# Altium PCB PCB1_HTTNTD.PcbDoc
Units mm, origin at the board's own origin, x right, y up, seen from the top; angles counter-clockwise.
Board outline 150.62 x 105.41 mm, 2 copper layers (Top Layer, Bottom Layer); 40 components, 33 nets, 167 pads, 5 vias.
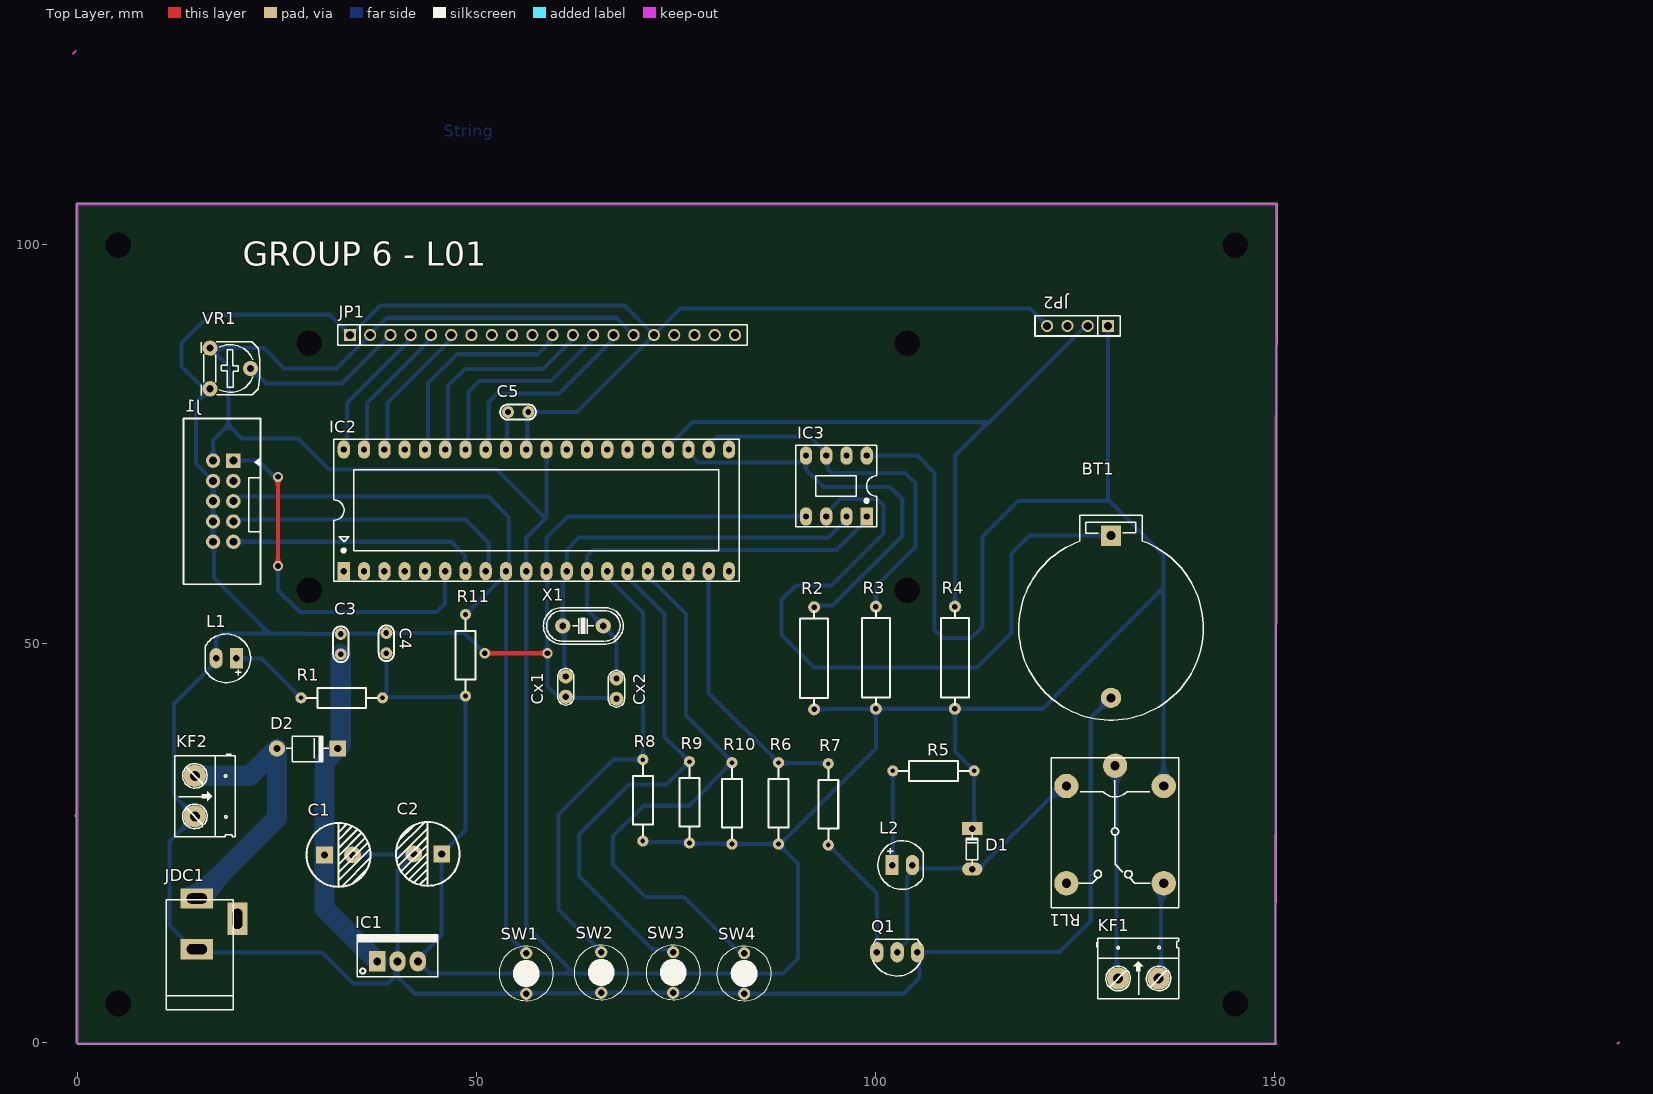
[diagram p0: Top Layer view]
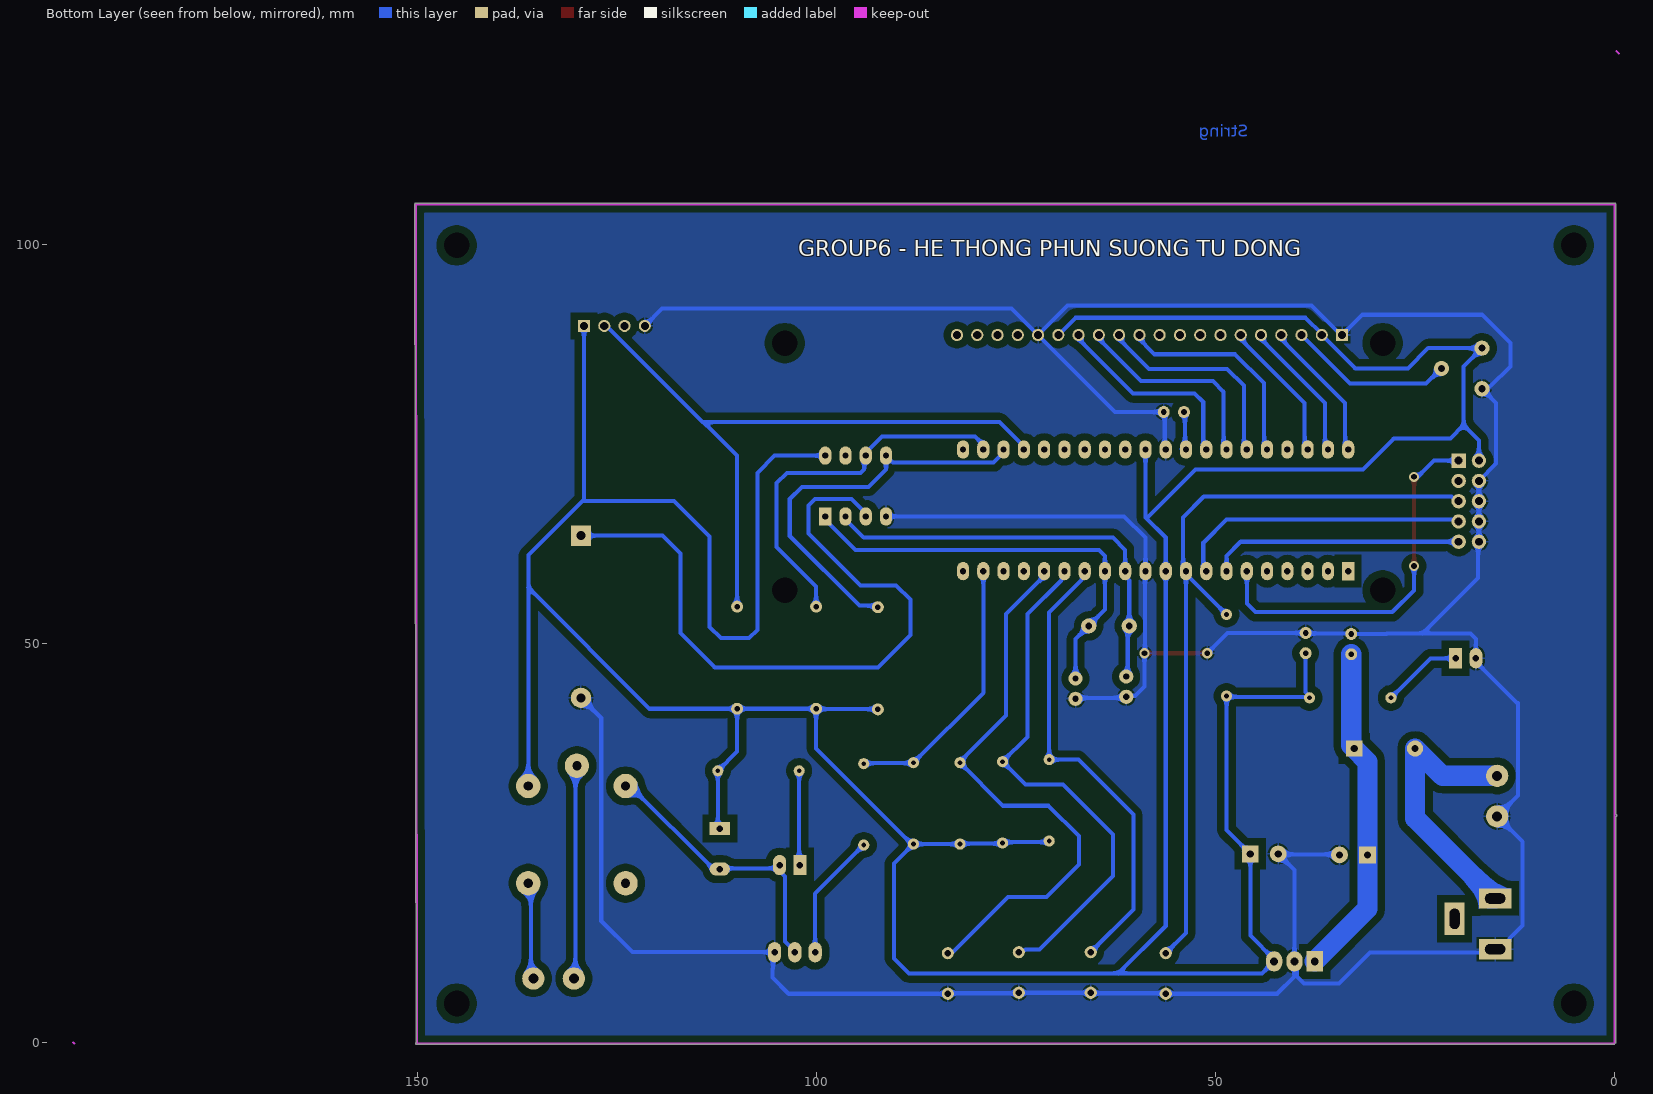
[diagram p1: Bottom Layer view, seen from below]
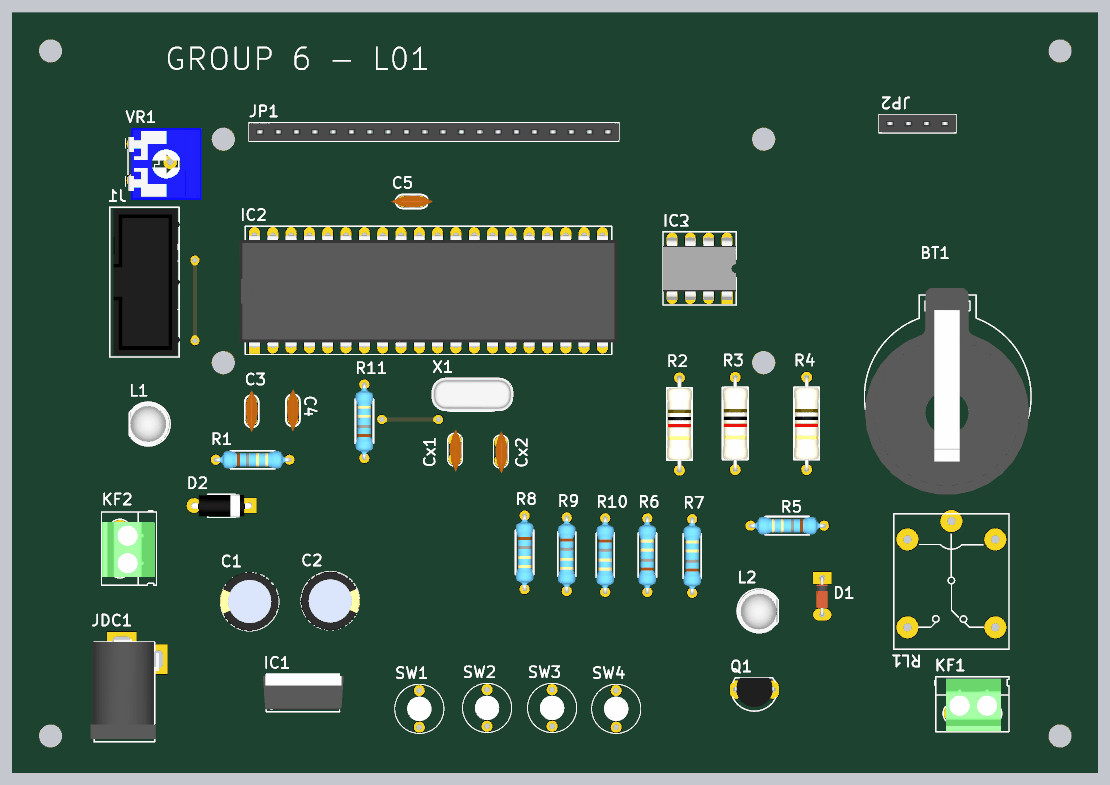
[diagram p2: 3D render of the assembled board from above, using the file's embedded part models]

## Layer stack, top to bottom
Top Solder: solder mask 0.0102, Solder Resist, Dk 3.5
Top Layer: signal copper 0.0356
Dielectric 1: dielectric 0.32, FR-4, Dk 4.8
Bottom Layer: signal copper 0.0356
Bottom Solder: solder mask 0.0102, Solder Resist, Dk 3.5

## Board outline
-0.191,0.064 -0.191,28.384 cw(c-0.191,28.511) -0.281,28.602 -0.191,28.691 -0.191,105.093 cw(c-0.064,105.093) -0.064,105.22 150.178,105.22 cw(c150.178,105.093) 150.305,105.093 cw(c150.178,105.093) 150.279,105.014 cw(c150.178,104.936) 150.305,104.936 150.128,0.047 cw(c150.063,-0.064) 150.191,-0.064 cw(c150.063,-0.064) 150.063,-0.191 0.064,-0.191 cw(c0.063,-0.064) -0.027,-0.153 -0.154,-0.027 cw(c-0.064,0.063)

## Design rules (kind name [scope] priority, off if disabled: settings)
Clearance [All] p1: gap=0.9 ignorepadtopadclearanceinfootprint=FALSE
PolygonConnect [All] p1: connectstyle=Relief reliefconductorwidth=0.254 reliefentries=4 polygonreliefangle="90 Angle" airgapwidth=0.254
RoomDefinition SCH_HTTHTD [InComponentClass('SCH_HTTHTD')] p1: confinementstyle=ConfineIn formatcopy=TRUE lockcomponents=FALSE outline 158.94,17.462 484.822,17.462 484.822,100.774 158.94,100.774
RoutingVias [All] p1: holewidth=0.711 width=1.27 viastyle="Through Hole" minholewidth=0.711 minwidth=1.27 maxholewidth=0.711 maxwidth=1.27
SolderMaskExpansion [All] p1: expansion=0.102 istentingtop=FALSE
Width "Schematic Width Constraint" [All] p1: maxlimit=2.54 minlimit=0.254 preferedwidth=0.254 minimp=50.000000 maximp=50.000000 favimp=50.000000
Width [All] p2: maxlimit=2.54 minlimit=0.254 preferedwidth=0.508 minimp=50.000000 maximp=50.000000 favimp=50.000000
30 further rules are at their usual default settings.

## Components (designator, comment, footprint, x,y, rotation, side; value= is the part's Value field where it differs from the comment)
BT1 "PIN 3V" PIN3V 129.476,63.563 r270 top
C1 "1000uF" "tu hoa 8mm" 32.675,23.558 r0 top
C2 "1000uF" "tu hoa 8mm" 43.851,23.685 r180 top
C3 "104" "tu gom" 32.956,49.974 r90 top
C4 "104" "tu gom" 38.672,50.102 r90 top
C5 "104" "tu gom" 55.182,79.057 r0 top
Cx1 "22pF" CN1 61.151,45.91 r270 top value=33pF
Cx2 "22pF" CN1 67.5,45.657 r270 top value=33pF
D1 "100v" "DIODE 0.5A" 112.078,24.32 r270 top
D2 "100v" "DIODE 1A" 23.685,36.893 r180 top
IC1 "LM7805" QTO-220 37.529,10.223 r0 top
IC2 "ATMEL 16L" DIP40/W0.6 33.337,59.118 r0 top value="Atmega 16L"
IC3 "DS1307" DIP8/W0.3 98.87,65.977 r180 top
J1 "USB ISP" CON10_100_61201021621_TH_ST 18.224,67.882 r270 top
JDC1 "Jac DC" DC-IN 17.462,14.922 r90 top
JP1 "CNT LCD" "JP 1x20 CT" 34.099,88.709 r0 top
JP2 "DHT11" "JP 1x4 CT" 129.095,89.852 r180 top
KF1 "Động cơ" "Con 2 KF301 5.08" 130.365,8.064 r0 top
KF2 "Nguồn Vào" "Con 2 KF301 5.08" 14.668,33.465 r270 top
L1 "LED 5mm" LED-5MM-RED 19.875,48.197 r180 top
L2 "LED 5mm" LED-5MM-Yellow 102.044,22.288 r0 top
Q1 "C1815" QTO-92 102.679,11.367 r180 top
R1 "1k" "tro vach 1/4w" 33.084,43.243 r180 top
R2 "4.7k" "tro vach 1/2w" 92.266,48.197 r270 top
R3 "4.7k" "tro vach 1/2w" 100.013,48.273 r270 top
R4 "4.7k" "tro vach 1/2w" 109.918,48.274 r270 top
R5 "2k" "tro vach 1/4w" 107.231,34.099 r0 top
R6 "10k" "tro vach 1/4w" 87.82,30.015 r270 top
R7 "1k" "tro vach 1/4w" 94.044,29.889 r270 top
R8 "10k" "tro vach 1/4w" 70.802,30.396 r90 top
R9 "10k" "tro vach 1/4w" 76.644,30.142 r90 top
R10 "10k" "tro vach 1/4w" 81.978,30.015 r90 top
R11 "10k" "tro vach 1/4w" 48.578,48.578 r270 top
RL1 "Relay 10A/12V" RL_SPDT_10A 129.984,34.734 r270 top value="Relay SPDT, 10A, 12V"
SW1 "Button" SW/2/DIP 56.197,8.7 r90 top
SW2 "Button" SW/2/DIP 65.596,8.826 r90 top
SW3 "Button" SW/2/DIP 74.612,8.826 r90 top
SW4 "Button" SW/2/DIP 83.502,8.7 r90 top
VR1 "10K" VR 16.573,87.058 r270 top value="VR 10K"
X1 "4Mhz" XT2 63.309,52.261 r180 top

## Footprints (in the part's own frame and the unit in brackets; to place one, negate y for a bottom-side part, rotate by r counter-clockwise, add the part's x,y. Pads: shape width x height; smd on the part's side, far side on the other; paste and mask are expansions set on the pad)
CN1 [mil]
  round 70 hole 31: 1(0,0) 2(100,0)
  silkscreen extent -40,-40 141,40, body extent -60,-30 170,37, height 265
CON10_100_61201021621_TH_ST [mm] "Connector Header"
  rect 1.8x1.8 hole 1 paste-1000 mask+0: 1(-5.08,1.27)
  round 1.8 hole 1 paste-1000 mask+0: 2(-5.08,-1.27) 3(-2.54,1.27) 4(-2.54,-1.27) 5(0,1.27) 6(0,-1.27) 7(2.54,1.27) 8(2.54,-1.27) 9(5.08,1.27) 10(5.08,-1.27)
  silkscreen extent -10.36,-4.98 10.39,4.67, body extent -10.16,-4.45 10.16,4.78, height 9.22
"Con 2 KF301 5.08" [mil]
  round 110 hole 50: 1(0,0) 2(200,0)
  silkscreen extent -106,-100 300,200, body extent -45,-97 255,190, height 335
DC-IN [mil] "Jac DC input"
  rect 100x160 hole 50 slot 100 at 90 deg: 1(125,100) 2(-125,100)
  rect 160x100 hole 50 slot 100 at 0 deg: 3(25,-100)
  silkscreen extent -425,-80 120,250, body extent -410,-105 134,269, height 434
"DIODE 0.5A" [mil] "Diode muoi, xung"
  oval 65x100 hole 32: 1(100,0)
  rect 65x100 hole 32: 2(-100,0)
  silkscreen extent -80,-30 80,28, body extent -108,-33 108,32, height 61
"DIODE 1A" [mil] "Diode 1A"
  round 80 hole 35: 1(-50,0)
  rect 80x80 hole 35: 2(-350,0)
  silkscreen extent -305,-61 -95,65, body extent -366,-61 -34,65, height 122
DIP8/W0.3 [mil] "8 PIN, W 300mil, Pin to pin 100mil"
  rect 60x90 hole 31: 1(0,0)
  oval 60x90 hole 31: 2(100,0) 3(200,0) 4(300,0) 5(300,-300) 6(200,-300) 7(100,-300) 8(0,-300)
  silkscreen extent -50,-350 350,50, body extent -50,-336 350,40, height 201
DIP40/W0.6 [mil] "40 PIN, W 600mil, Pin to pin 100mil"
  rect 60x90 hole 31: 1(0,0)
  oval 60x90 hole 31: 2(100,0) 3(200,0) 4(300,0) 5(400,0) 6(500,0) 7(600,0) 8(700,0) 9(800,0) 10(900,0) 11(1000,0) 12(1100,0) 13(1200,0) 14(1300,0) 15(1400,0) 16(1500,0) 17(1600,0) 18(1700,0) 19(1800,0) 20(1900,0) 21(1900,600) 22(1800,600) 23(1700,600) 24(1600,600) 25(1500,600) 26(1400,600) 27(1300,600) 28(1200,600) 29(1100,600) 30(1000,600) 31(900,600) 32(800,600) 33(700,600) 34(600,600) 35(500,600) 36(400,600) 37(300,600) 38(200,600) 39(100,600) 40(0,600)
  silkscreen extent -50,-50 1950,650, body extent -82,-10 1982,600, height 224
"JP 1x4 CT" [mm]
  rect 1.52x1.52 hole 1.02: 1(0,0)
  round 1.52 hole 1.02: 2(2.54,0) 3(5.08,0) 4(7.62,0)
  silkscreen extent -1.52,-1.27 9.14,1.27, body extent -1.52,-1.25 9.14,1.25, height 8.51
"JP 1x20 CT" [mm] "20 row, straight, gold plating"
  rect 1.52x1.52 hole 1.02: 1(0,0)
  round 1.52 hole 1.02: 2(2.54,0) 3(5.08,0) 4(7.62,0) 5(10.16,0) 6(12.7,0) 7(15.24,0) 8(17.78,0) 9(20.32,0) 10(22.86,0) 11(25.4,0) 12(27.94,0) 13(30.48,0) 14(33.02,0) 15(35.56,0) 16(38.1,0) 17(40.64,0) 18(43.18,0) 19(45.72,0) 20(48.26,0)
  silkscreen extent -1.52,-1.27 49.78,1.27, body extent -1.52,-1.25 49.78,1.25, height 8.51
LED-5MM-RED [mil] "LED 2 PIN, 5 ly , Only colour,pin to pin 100mil"
  rect 65x100 hole 32: 1(0,0)
  oval 65x100 hole 32: 2(100,0)
  silkscreen extent -70,-120 154,120, body extent -65,-119 149,118, height 339
LED-5MM-Yellow [mil] "LED 2 PIN, 5 ly , Only colour,pin to pin 100mil"
  rect 65x100 hole 32: 1(0,0)
  oval 65x100 hole 32: 2(100,0)
  silkscreen extent -70,-120 154,120, body extent -67,-122 147,115, height 339
PIN3V [mil] "Socket PIN 3V"
  rect 100x100 hole 45: 1(0,0)
  round 100 hole 45: 2(800,0)
  silkscreen extent -100,-455 910,455, body extent -138,-452 992,444, height 278
QTO-92 [mil] "TO-92"
  oval 66x100 hole 32: 1(-100,0) 2(0,0) 3(100,0)
  silkscreen extent -117,-65 120,118, body extent -109,-66 109,95, height 245
QTO-220 [mil] "TO-220 - 1-2-3"
  rect 80x100 hole 39: 1(0,0)
  oval 80x100 hole 39: 2(100,0) 3(200,0)
  silkscreen extent -100,-76 300,130, body extent -119,-64 322,121, height 905
RL_SPDT_10A [mil] "Relay SPDT, 5 pin, 10A,W 650mil, L 800mil, H 800mil"
  round 120 hole 45: 1(0,0) 2(580,240) 3(580,-240) 4(100,-240) 5(100,240)
  silkscreen extent -40,-315 700,315, body extent -40,-315 700,315, height 630
SW/2/DIP [mil]
  round 60 / inner round 62 / far side round 60 hole 31: 1(-100,0) 2(100,0)
  silkscreen extent -134,-134 134,134, body extent -134,-134 135,135, height 150
"tro vach 1/2w" [mm]
  round 1.5 hole 0.7: 1(-6.4,0) 2(6.4,0)
  silkscreen extent -5.84,-1.75 5.84,1.75, body extent -6.62,-1.75 6.62,1.75, height 3.5
"tro vach 1/4w" [mm]
  round 1.4 hole 0.6: 1(-5.1,0) 2(5.1,0)
  silkscreen extent -4.39,-1.25 4.42,1.25, body extent -5.38,-1.2 5.38,1.2, height 2.41
"tu gom" [mm] "Tu gom mini"
  round 1.5 hole 0.7: 1(-1.27,0) 2(1.27,0)
  silkscreen extent -2.25,-0.97 2.22,0.97, body extent -2.92,-0.85 2.92,0.85, height 6.12
"tu hoa 8mm" [mm]
  rect 2.1x2.1 hole 0.9: 1(-1.75,0)
  round 2.1 hole 0.9: 2(1.75,0)
  silkscreen extent -4,-4 4,4, body extent -4.1,-4.07 4.1,4.13, height 13.81
VR [mil] "Resistor Variable"
  round 75 hole 35: 1(0,0) 2(100,200) 3(200,0)
  silkscreen extent -31,-44 231,246, body extent -87,-30 307,372, height 165
XT2 [mil] "Footpin for Crystal 2 pin"
  round 75 hole 34: 1(-100,0) 2(100,0)
  silkscreen extent -198,-90 195,90, body extent -233,-93 213,90, height 138

## Part data
BT1: "Battery 3VDC"
C1 C2: library part "Tu Hoa 1000uF 16V 8x20", "Cắm", Chung_Loai=Cắm, Don_Vi=Con, Ma_Hang=MH008300, So_Chan=2, Ten_Linh_Kien="Tụ Hóa 1000uF 16V 8x20MM"
C3 C4 C5: library part "Tu gom 104 50V", "Cắm", Chung_Loai=Cắm, Don_Vi=Con, Ma_Hang=MH004761, So_Chan=2, Ten_Linh_Kien="Tụ gốm 104 100nF 50V"
Cx1 Cx2: library part CN0, "Cremic For Xtal 1pF => 100pF"
D1: library part "Diode 1N4148", "Cắm", Chung_Loai=Cắm, Don_Vi=Con, Ma_Hang=MH001065, Ten_Linh_Kien="Diode 1N4148 DO35 450mA 100V ( 1N4148 DIP)"
D2: library part "Diode 1N4007", "Cắm", Chung_Loai=Cắm, Don_Vi=Con, Ma_Hang=MH001063, Ten_Linh_Kien="Diode 1N4007 1A (DIP)"
IC1: library part LM78xx, "On ap +, from + 5 to + 24VDC"
IC2: library part Atmega16L, "8-Bit AVR Microcontroller with 16K Bytes of In-System Programmable Flash Memory"
IC3: "Real Timer Serial"
J1: library part CON-PLG_5X2-100-ST-TH, "10 Pins, 2 Row 2.54mm Pitch, straight Connector, male", Alternate Part Number-1=NA, Case/Package=TH-CON, Crimp Part Number=63911015521CAB, Manufacturer="Wurth Electronics", Manufacturer Part Number=61201021621, Mating Part Number=61201023021, Supplier Part Number-1=61201021621, Supplier-1=WURTH
JDC1: library part DCIN, "Jac DC input"
JP1: library part "JP 1x20 2.54 Cai Thang", "Cắm", Chung_Loai=Cắm, Don_Vi=Con, Ma_Hang=MH004006, Ten_Linh_Kien="Jump Đơn Cái 2.54MM 1x20P Thẳng"
JP2: library part "JP 1x4 2.54 Cai Thang", "Cắm", Chung_Loai=Cắm, Don_Vi=Con, Ma_Hang=MH004006, Ten_Linh_Kien="Jump Đơn Cái 2.54MM 1x20P Thẳng"
KF1 KF2: library part "CON 2 KF301", "Cắm", Chung_Loai=Cắm, Don_Vi=Con, Ma_Hang=MH000987, Ten_Linh_Kien="CON 2 KF301-2P 5.08MM Xanh Dương"
L1: library part "LED 5mm Do", "Cắm", Chung_Loai=Cắm, Don_Vi=Con, Ma_Hang=MH008967, Ten_Linh_Kien="Led 5MM Phủ Đỏ (1000c)"
L2: library part "LED 5mm Vang", "Cắm", Chung_Loai=Cắm, Don_Vi=Con, Ma_Hang=MH008968, Ten_Linh_Kien="Led 5MM Phủ Vàng (1000c)"
Q1: "NPN 600mW, ECB"
R1 R7: library part "Tro Vach 1/4W 5% 1k", "Cắm", Chung_Loai=Cắm, Don_Vi=Con, Ma_Hang=MH007390, So_Chan=2, Ten_Linh_Kien="Trở Vạch 1/4w 5% 1k"
R2 R3 R4: library part "Tro Vach 1/2W 5% 4.7k", "Cắm", Chung_Loai=Cắm, Don_Vi=Con, Ma_Hang=MH006198, So_Chan=2, Ten_Linh_Kien="Trở 5% 1/2w 4.7k"
R5: library part "Tro Vach 1/4W 5% 2k", "Cắm", Chung_Loai=Cắm, Don_Vi=Con, Ma_Hang=MH007305, So_Chan=2, Ten_Linh_Kien="Trở Vạch 1/4w 5% 2k"
R6 R8 R9 R10: library part "Tro Vach 1/4W 1% 10k", "Cắm", Chung_Loai=Cắm, Don_Vi=Con, Ma_Hang=MH006349, So_Chan=2, Ten_Linh_Kien="Trở Vạch 1/4w 1% 10k"
R11: library part "Tro Vach 1/4W 5% 10k", "Căm", Chung_Loai=Cắm, Don_Vi=Con, Ma_Hang=MH007354, So_Chan=2, Ten_Linh_Kien="Trở Vạch 1/4w 5% 10K"
RL1: library part "Relay 1", "Relay SPDT,10A - 12VDC 5 Pin"
SW1 SW2 SW3 SW4: library part "SW SPST", "Tact switch 2 pin"
VR1: library part VR, "Var Resistor"
X1: library part XT2, "Crystal For all Crystal 2pin."

## Free pads (board coordinates)
  round 1.524 hole 3.2 paste+0 mask+0.102: 7(29.019,87.694)
  round 1.524 hole 3.2: 8(29.019,56.706) 10(103.95,56.706) 12(103.95,87.694) q(5.064,4.937) q(5.064,99.937) q(145.063,4.937) q(145.063,99.937)

## Via types
v1: diameter 1.27, hole 0.711, Top Layer to Bottom Layer, 5 vias

## Nets (pads, with @x,y where several pads share a name; then routed paths per layer and width w, separated by ;. In a path a pad name is that pad's centre, name@x,y a point inside that pad or via, vN(x,y) a via of type N, cw(c..) or ccw(c..) an arc to the next point about the centre after c; other vN are vias at no path point)
+12: C1.1 C3.1 D2.2 IC1.1 | length 42.1
  Bottom Layer w2.54: C3.1 32.956,37.274 D2.2 30.924,35.242 C1.1 30.924,16.828 IC1.1
DHT11: IC2.24 JP2.2 R4.1 | length 84.1
  Bottom Layer w0.508: IC2.24 73.977,74.739 77.025,77.787 114.109,77.787 ; R4.1 109.918,73.596 114.109,77.787 ; JP2.2 126.301,89.852 114.236,77.787 114.109,77.787
Down: IC2.16 R10.2 SW4.2 | length 71.7
  Bottom Layer w0.508: IC2.16 71.438,58.483 76.2,53.721 76.2,41.021 R10.2@82.042,35.179 ; R10.2 76.581,29.718 70.866,29.718 67.056,25.908 67.056,22.352 71.12,18.288 75.946,18.288 82.8,11.434 83.308,11.434 SW4.2
GND: BT1.2 C1.2 C2.2 C3.2 C4.2 C5.2 Cx1.2 Cx2.2 IC1.2 IC2.11 IC2.31 IC3.4 J1.4 J1.6 J1.8 J1.10 JDC1.2 JP1.1 JP1.16 JP2.4 KF2.2 L1.2 Q1.1 SW1.1 SW2.1 SW3.1 SW4.1 VR1.3 | length 509.1
  Top Layer w0.508: v1(50.99,48.831) v1(58.864,48.831)
  Bottom Layer w0.508: JP1.1 31.559,91.249 16.573,91.249 13.018,87.694 13.018,84.772 15.544,82.246 16.306,82.246 VR1.3 14.795,80.2 14.795,72.58 J1.4 J1.6 J1.8 J1.10 17.05,62.706 17.05,58.261 24.016,51.295 ; JP1.1@34.227,88.709 37.91,92.392 68.516,92.392 JP1.16 ; C1.2 34.488,23.622 C2.2@42.037,23.622 ; C2.2 C2.2@42.037,23.622 ; v1(50.99,48.831) 48.45,51.371 C4.2 38.608,51.308 33.02,51.308 C3.2 28.512,51.244 28.461,51.295 24.016,51.295 ; IC2.31 56.325,74.486 56.325,78.93 C5.2 62.547,79.057 JP1.16 ; Cx1.2 60.999,43.522 59.983,43.522 58.864,44.64 v1(58.864,48.831) 58.801,48.895 58.801,59.055 IC2.11 58.737,63.309 61.404,65.977 IC3.4 ; Cx1.2@61.277,43.243 67.373,43.243 Cx2.2 ; JP2.4 119.316,92.011 75.501,92.011 JP1.16 ; BT1.2 126.936,40.703 126.936,15.303 122.999,11.367 105.417,11.367 Q1.1 105.417,11.169 105.417,9.335 105.474,9.278 105.474,8.191 103.441,6.159 SW4.1 83.439,6.223 74.676,6.223 SW3.1 SW2.1 65.532,6.223 56.261,6.223 SW1.1 42.227,6.159 40.069,8.319 IC1.2 ; 24.016,51.295 18.021,51.295 17.335,50.609 L1.2 17.335,47.752 12.192,42.608 12.045,42.608 12.045,31.008 KF2.2 11.493,25.209 11.493,14.726 13.144,13.075 13.144,12.763 14.16,11.747 JDC1.2 15.367,11.303 30.607,11.303 34.48,7.429 38.882,7.429 39.777,8.324 39.777,9.932 IC1.2 ; IC1.2 40.069,21.653 C2.2@42.037,23.622
"LCD A0": IC2.40 JP1.4 | length 17.8
  Bottom Layer w0.508: IC2.40@33.718,74.231 33.718,80.2 JP1.4@42.1,88.582
"LCD A1": IC2.39 JP1.5 | length 17.8
  Bottom Layer w0.508: IC2.39@36.258,74.231 36.258,80.2 JP1.5@44.64,88.582
"LCD A2": IC2.38 JP1.6 | length 17.8
  Bottom Layer w0.508: IC2.38@38.798,74.231 38.798,80.2 JP1.6@47.18,88.582
"LCD A4": IC2.36 JP1.11 | length 26.9
  Bottom Layer w0.508: IC2.36@43.878,74.231 43.878,82.677 47.498,86.296 57.594,86.296 JP1.11@59.88,88.582
"LCD A5": IC2.35 JP1.12 | length 26.7
  Bottom Layer w0.508: IC2.35@46.419,74.231 46.419,82.359 48.514,84.455 58.293,84.455 JP1.12@62.42,88.582
"LCD A6": IC2.34 JP1.13 | length 26.3
  Bottom Layer w0.508: IC2.34@48.959,74.231 48.959,81.597 50.292,82.931 59.309,82.931 JP1.13@64.96,88.582
"LCD A7": IC2.33 JP1.14 | length 25.5
  Bottom Layer w0.508: IC2.33@51.498,74.231 51.498,80.328 52.578,81.407 60.325,81.407 JP1.14@67.501,88.582
MISO: IC2.7 J1.9 | length 31.7
  Bottom Layer w0.508: J1.9 46.799,62.801 48.578,61.023 IC2.7
MODE: IC2.14 R8.2 SW2.2 | length 58.3
  Bottom Layer w0.508: SW2.2 60.261,16.7 60.261,28.608 67.15,35.496 R8.2 70.802,53.935 66.749,57.989 66.749,58.072 66.358,58.463 IC2.14
MOSI: IC2.6 J1.1 | length 47.3
  Top Layer w0.508: v1(25.082,59.753) v1(25.082,70.929)
  Bottom Layer w0.508: v1(19.494,72.962) 22.593,72.962 24.479,71.075 24.937,71.075 v1(25.082,70.929) ; v1(25.082,59.753) 25.082,56.706 27.813,53.975 44.958,53.975 46.038,55.054 IC2.6
NetBT1_1: BT1.1 IC3.3 | length 88.3
  Bottom Layer w0.508: IC3.3 93.789,66.358 95.567,68.135 100.139,68.135 100.945,67.33 100.945,63.861 94.424,57.34 89.98,57.34 88.201,55.562 88.201,51.117 92.266,47.053 112.712,47.053 117.03,51.371 117.03,61.357 119.237,63.563 BT1.1
NetC5_1: C5.1 IC2.32 | length 5.5
  Bottom Layer w0.508: IC2.32 53.785,74.486 53.785,78.612 54.071,78.898 54.23,79.057 C5.1 ; IC2.32@54.038,74.231 IC2.32@54.23,74.423
NetD1_1: D1.1 L2.2 Q1.2 RL1.4 | length 35.5
  Bottom Layer w0.254: L2.2@104.584,21.804 L2.2 L2.2@104.997,21.876 ; D1.1@111.982,21.876 D1.1 D1.1@112.9,21.78 ; RL1.4@123.314,32.194 RL1.4
  Bottom Layer w0.508: Q1.2 102.679,11.482 103.886,12.689 103.886,20.848 104.584,21.546 L2.2@104.584,21.804 ; L2.2@104.997,21.876 D1.1@111.982,21.876 ; D1.1@112.9,21.78 RL1.4@123.314,32.194
NetD2_1: D2.1 JDC1.1 KF2.1 | length 35.1
  Bottom Layer w2.54: KF2.1 21.526,33.465 D2.1 24.956,28.13 15.684,18.86 15.684,18.098 JDC1.1
NetKF1_1: KF1.1 RL1.1 | length 26.9
  Bottom Layer w0.508: KF1.1@129.928,8.502 130.175,8.255 130.175,34.544 RL1.1
NetKF1_2: KF1.2 RL1.2 | length 12.2
  Bottom Layer w0.254: KF1.2 KF1.2@135.763,8.382 ; RL1.2@135.763,19.685 RL1.2
  Bottom Layer w0.508: KF1.2@135.763,8.382 RL1.2@135.763,19.685
NetL1_1: L1.1 R1.2 | length 10.2
  Bottom Layer w0.508: L1.1 23.03,48.197 R1.2
NetL2_1: L2.1 R5.1 | length 11.8
  Bottom Layer w0.508: L2.1 102.131,22.375 R5.1
NetQ1_3: Q1.3 R7.2 | length 15.9
  Bottom Layer w0.508: R7.2 100.139,18.693 Q1.3
role: IC2.19 R6.1 R7.1 | length 33.9
  Bottom Layer w0.508: IC2.19 79.057,43.878 R6.1 87.884,35.052 93.98,35.052 R7.1
RST: IC2.9 J1.5 R11.1 SW1.2 | length 98.7
  Bottom Layer w0.508: J1.5 19.844,67.882 20.416,68.453 51.435,68.453 54.038,65.85 IC2.9@54.038,59.118 ; R11.1 48.588,53.678 IC2.9@53.657,58.748 ; IC2.9 IC2.9@53.657,58.748 ; SW1.2 53.657,13.779 IC2.9@53.657,58.748
SCK: IC2.8 J1.7 | length 37
  Bottom Layer w0.508: J1.7 19.742,65.589 20.431,65.589 20.438,65.596 48.577,65.596 51.498,62.674 IC2.8@51.498,58.991
SCL: IC2.22 IC3.6 R3.1 | length 48
  Bottom Layer w0.508: IC2.22 79.057,74.993 80.073,76.01 91.757,76.01 93.789,73.977 IC3.6 93.984,73.402 93.984,71.878 94.424,71.438 103.685,71.438 104.965,70.157 104.965,62.166 100.013,57.213 R3.1
SDA: IC2.23 IC3.5 R2.1 | length 50.8
  Bottom Layer w0.508: IC2.23 76.517,73.977 77.787,72.707 90.361,72.707 90.489,72.836 90.595,72.836 91.249,73.49 IC3.5 91.249,71.878 93.468,69.659 101.79,69.659 103.314,68.135 103.314,63.52 94.581,54.786 92.455,54.786 R2.1
"TA XTAL1": Cx2.1 IC2.13 IC3.1 X1.1 | length 54.2
  Bottom Layer w0.508: Cx2.1 67.501,50.61 X1.1 63.817,54.293 IC2.13 63.817,61.023 64.579,61.785 95.059,61.785 98.87,65.596 IC3.1
"TA XTAL2": Cx1.1 IC2.12 IC3.2 X1.2 | length 53.3
  Bottom Layer w0.508: Cx1.1 60.96,46.101 60.96,52.07 X1.2 60.77,57.955 61.277,58.463 61.277,61.785 62.801,63.309 94.043,63.309 96.329,65.596 IC3.2 ; IC2.12@61.658,58.991 IC2.12@61.722,58.928
Up: IC2.15 R9.2 SW3.2 | length 65.7
  Bottom Layer w0.508: IC2.15 68.897,58.463 69.277,58.083 69.277,57.977 73.533,53.721 73.533,38.354 R9.2 73.787,32.385 69.088,32.385 62.801,26.098 62.801,20.892 72.009,11.684 73.807,11.684 73.93,11.561 74.418,11.561 SW3.2
VCC: C2.1 C4.1 D1.2 IC1.3 IC2.10 IC2.30 IC3.8 J1.2 JP1.2 JP1.15 JP2.1 R1.1 R2.2 R3.2 R4.2 R5.2 R6.2 R8.1 R9.1 R10.1 R11.2 RL1.5 VR1.1 | length 535
  Bottom Layer w0.508: J1.2 16.954,75.501 18.86,77.406 ; C4.1 38.672,43.973 38.184,43.485 R1.1 38.301,43.36 48.461,43.36 R11.2 48.578,26.662 C2.1 45.601,13.47 42.608,10.477 IC1.3 44.133,8.7 62.166,8.7 ; 58.61,65.722 52.451,71.882 31.496,71.882 27.622,75.755 20.511,75.755 18.86,77.406 ; IC2.30 58.737,65.849 56.197,63.309 IC2.10 56.197,14.668 62.166,8.7 ; JP1.15 67.501,90.868 38.672,90.868 36.639,88.837 JP1.2 32.448,84.519 25.845,84.519 23.304,87.058 VR1.1 18.86,84.772 18.86,77.406 ; R8.1 70.929,25.169 76.517,25.169 R9.1 76.708,24.979 81.915,24.979 R10.1 R6.2 ; R2.2 92.304,41.835 99.974,41.835 R3.2 ; IC3.8 105.219,73.596 107.379,71.438 107.379,51.752 108.394,50.736 111.95,50.736 113.347,52.133 113.347,63.436 117.792,67.882 129.095,67.882 JP2.1 ; D1.2 112.331,27.114 R5.2 109.918,36.512 R4.2 ; 129.095,68.107 136.081,61.122 136.081,57.087 ; RL1.5 136.081,57.087 ; 62.166,8.7 88.373,8.7 90.233,10.56 90.233,22.503 R6.2 88.035,24.916 100.013,36.893 R3.2 ; R3.2 R4.2 ; R4.2 120.868,41.874 136.081,57.087
VSS: JP1.3 VR1.2 | length 20.8
  Bottom Layer w0.508: VR1.2 23.558,82.614 33.084,82.614 JP1.3
pads on no net: IC2.1 IC2.2 IC2.3 IC2.4 IC2.5 IC2.17 IC2.18 IC2.20 IC2.21 IC2.25 IC2.26 IC2.27 IC2.28 IC2.29 IC2.37 IC3.7 J1.3 JDC1.3 JP1.7 JP1.8 JP1.9 JP1.10 JP1.17 JP1.18 JP1.19 JP1.20 JP2.3 RL1.3

## Polygon pours and split planes (outlines as drawn)
GND on Bottom Layer "GND_L02_P000" (solid, remove dead copper, pour order 0): 0,105.156 0,0 150.114,0 150.241,0.127 150.241,105.283 0,105.283 -0.127,105.156

## Keep-outs
Keep-Out Layer:
  lines w0.254: -0.572,124.015 -0.318,124.269 ; 150,-0.064 150.178,104.936 ; 150.063,-0.064 0.064,-0.064 -0.064,0.064 -0.064,105.093 150.178,105.093 ; 192.976,-0.064 193.103,0.064

## Other copper
Top Layer:
Bottom Layer:
  text "String" at 45.847,113.538 h1.52

## Silkscreen, mask and mechanical layers (free items; w line width, h text height)
Top Overlay:
  text "GROUP 6 - L01" at 20.701,97.409 h3
Bottom Overlay:
  text "GROUP6 - HE THONG PHUN SUONG TU DONG" at 102.235,98.552 h2